# Altium PCB PA_Channel_SUP_CTRL.PcbDoc (part 2 of 2)
Units mm, origin at the board's own origin, x right, y up, seen from the top; angles counter-clockwise.
Board outline 189.6 x 31.35 mm, 2 copper layers (Top Layer, Bottom Layer), stack 1.571 mm thick; 72 components, 44 nets, 242 pads, 317 vias.
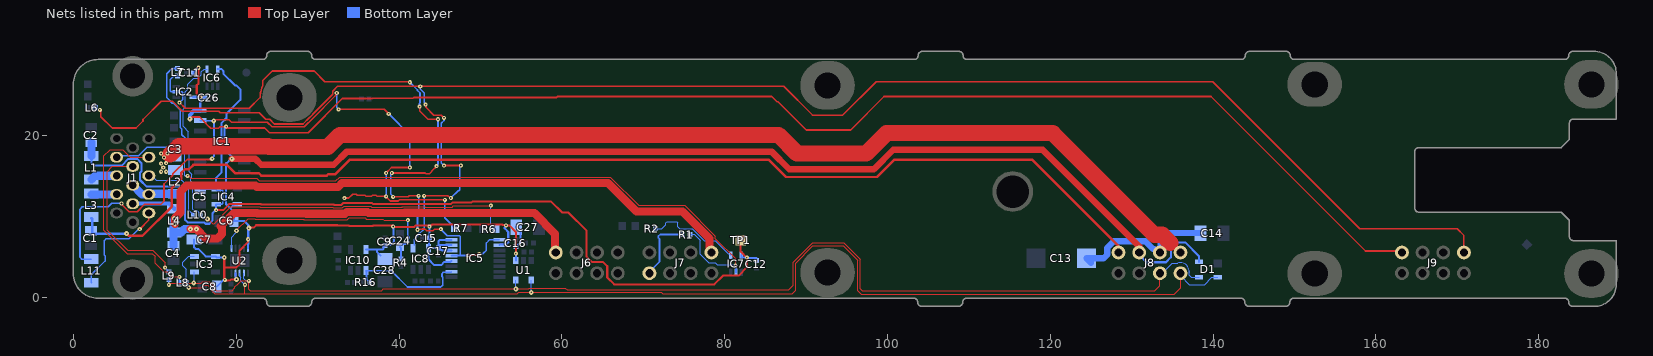
[diagram p2: the nets of this part, all layers, seen from the top]

## Via types
v1: diameter 0.5, hole 0.2, Top Layer to Bottom Layer, tented both sides, 251 vias
v2: diameter 0.6, hole 0.2, Top Layer to Bottom Layer, tented both sides, 55 vias
v3: diameter 0.6, hole 0.3, Top Layer to Bottom Layer, tented both sides, 11 vias

## Nets (pads, with @x,y where several pads share a name; then routed paths per layer and width w, separated by ;. In a path a pad name is that pad's centre, name@x,y a point inside that pad or via, vN(x,y) a via of type N, cw(c..) or ccw(c..) an arc to the next point about the centre after c; other vN are vias at no path point) (continued)
NetIC5_10: IC5.10 IC10.1 R16.2 | length 14.7
  Bottom Layer w0.203: R16.2@36.374,1.902 36.374,1.922 36.185,2.11 36.165,2.11 35.978,2.298 35.978,3.278 IC10.1@35.904,3.352 35.978,3.352 39.002,3.352 41.015,1.339 45.112,1.339 45.332,1.559 45.332,2.518 45.258,2.593 45.258,2.981 45.413,3.136 46.322,3.136 IC5.10@46.413,3.227
NetJ1_1: J1.1 L11.1 | length 13.4
  Top Layer w0.2: v1(8.113,8.445) 9.23,9.562 J1.1@9.23,10.432
  Bottom Layer w0.2: L11.1@2.193,1.864 L11.1@2.169,1.864 2.169,2.857 3.851,4.538 3.851,5.188 3.748,5.292 3.748,7.034 3.961,7.248 6.77,7.248 8.016,8.494 8.065,8.445 v1(8.113,8.445)
NetJ1_2: J1.2 J1.8 L2.1 | length 5.8
  Bottom Layer w1: J1.8@7.25,13.861 8.393,12.718 J1.2@9.23,12.718 9.312,12.8 L2.1@12.5,12.8
NetJ1_3: J1.3 L10.1 | length 9.1
  Bottom Layer w0.152: J1.3@9.23,15.004 9.555,15.004 10.12,14.439 13.259,14.439 14.133,13.565 14.133,10.763 14.689,10.207 L10.1@14.689,10.197
NetJ1_4: J1.4 L8.1 | length 28.2
  Top Layer w0.152: J1.4@9.23,17.29 6.929,17.29 5.999,18.219 4.5,18.219 3.72,17.439 3.72,8.291 6.572,5.439 9.671,5.439 9.993,5.117 9.993,4.254 10.729,3.517 10.764,3.517 11.039,3.242 11.411,3.242 12.075,2.577 v1(12.99,2.577)
  Bottom Layer w0.203: L8.1@12.962,1.891 12.962,2.549 v1(12.99,2.577)
NetJ1_7: J1.7 L4.1 | length 5.4
  Bottom Layer w0.5: J1.7@7.25,11.575 11.739,11.575 L4.1@12.364,10.95
NetJ1_9: J1.9 L9.1 | length 20.7
  Top Layer w0.152: J1.9@7.25,16.147 4.75,16.147 4.126,15.523 4.126,8.342 6.623,5.845 9.695,5.845 11.237,4.304 v1(11.237,3.72)
  Bottom Layer w0.152: v1(11.237,3.72) 11.694,3.263 L9.1@11.694,3.19
NetJ1_12: J1.12 L3.2 | length 3.1
  Bottom Layer w1: L3.2@2.164,12.7 5.252,12.7 J1.12@5.27,12.718
NetJ1_13: J1.13 L1.2 | length 3.3
  Bottom Layer w1: L1.2@2.164,14.55 2.618,15.004 J1.13@5.27,15.004
NetJ1_14: J1.14 L7.2 | length 20.7
  Bottom Layer w0.2: J1.14@5.27,17.29 5.436,17.456 7.956,17.456 9,18.5 11.493,18.5 11.67,18.323 12.927,18.323 13,18.25 13.257,18.25 13.477,18.47 13.477,18.477 13.75,18.75 13.75,19.59 13.291,20.049 13.291,20.765 13.112,20.944 13.112,23.064 12.263,23.913 12.12,23.913 11.418,24.615 11.418,27.549 12.053,28.183 L7.2@12.761,28.183
NetJ7_8: J7.8 R1.2 | length 8.3
  Bottom Layer w0.2: J7.8@70.5,2.98 71.975,4.455 71.975,7.255 71.833,7.398 71.833,7.563 72.054,7.784 R1.2@74.78,7.784
ON_OFF: IC2.2 IC5.1 IC5.13 L7.1 | length 82
  Top Layer w0.2: v1(13,24) 13.703,23.297 21.585,23.297 22.9,24.613 cw(c26.153,24.624) 23.25,26.092 23.25,26.734 24.393,27.877 29.56,27.877 30.86,26.577 41.225,26.577 v1(41.302,26.5) ; v1(39.092,15.353) 43.186,15.353 43.292,15.248 43.708,15.248 44.002,15.542 44.002,15.592 v1(44.602,16.192) ; v1(39.25,12.408) 41.106,12.408 41.245,12.547 v1(42.382,12.547) ; v1(42.248,8.378) 42.306,8.435 42.787,8.435 42.821,8.469 43.156,8.469 43.375,8.25 44.144,8.25 44.344,8.45 v1(45.112,8.45) ; v1@42.462,23.462 v1(42.5,23.5) 42.5,22.98 43.53,21.95 v1(44.756,21.95) ; v1(48.467,5.226) 49.614,5.226 49.75,5.362 v1(49.831,5.362)
  Bottom Layer w0.2: L7.1@12.761,27.263 12.276,27.263 11.847,26.834 11.847,25.463 11.989,25.321 IC2.2@12.592,25.321 13.262,25.321 13.38,25.203 13.38,24.38 v1(13,24) ; v1(39.092,15.353) 39.092,15.272 38.968,15.148 38.968,12.771 39.25,12.489 v1(39.25,12.408) ; v1(41.302,26.5) 42.248,25.554 42.248,25.493 42.55,25.191 42.55,23.959 42.484,23.894 42.484,23.516 v1(42.5,23.5) ; v1(42.248,8.378) 42.248,10.403 42.382,10.537 v1(42.382,12.547) ; v1(44.602,16.192) 44.602,16.273 44.756,16.428 v1(44.756,21.95) ; v1(45.112,8.45) 45.91,7.652 47.395,7.652 47.513,7.535 47.513,5.202 ; IC5.13@46.413,5.177 46.437,5.202 47.513,5.202 ; v1(48.467,5.226) 48.443,5.202 47.513,5.202 ; v1(49.831,5.362) 49.888,5.42 50.273,5.42 50.713,5.859 50.713,6.752 51.088,7.127 IC5.1@52.313,7.127
OUT_BIAS: C1.2 J8.7 L3.1 | length 142.2
  Top Layer w0.3: v2(6.5,7.9) 6.758,7.642 8.445,7.642 12.056,11.253 12.056,13.519 13.198,14.66 13.198,15.332 13.668,15.802 14.15,15.802 14.696,16.348 18.816,16.348 19.829,15.336 22.73,15.336 23.061,15.004 31.09,15.004 31.254,15.168 32.11,15.168 33.942,17 85.384,17 87.525,14.858 98.728,14.858 100.87,17 117.75,17 128.39,6.36 J8.7@128.39,5.27
  Bottom Layer w0.3: L3.1@2.164,9.8 2.25,9.714 2.25,7.9 v2(6.5,7.9)
Output_overdrive: IC1.13 L11.2 R7.2 | length 91.6
  Top Layer w0.203: v1(5.878,11.594) 5.878,11.519 6.797,10.6 7.805,10.6 8.707,11.503 10.714,11.503 11.096,11.885 11.096,13.988 12.179,15.071 12.179,15.239 13.94,17 v2@17.015,17 ; v2(17.206,21.754) 17.355,21.903 19.086,21.903 19.393,21.596 23.777,21.596 24.355,21.018 28.326,21.018 28.386,21.076 29.378,22.05 ccw(c26.853,24.624) 29.413,22.084 32.171,24.862 v1@32.301,25.129 ; v1(32.548,23.177) 38.155,23.177 v1(38.714,22.618) ; v1(33.25,12.25) 33.268,12.268 33.805,12.268 34.291,12.754 34.709,12.754 34.833,12.63 35.79,12.63 35.937,12.483 36.573,12.483 36.721,12.632 37.139,12.632 37.287,12.483 v1(38.39,12.483) 38.39,12.407 38.892,11.904 39.889,11.904 40.028,12.043 45.601,12.043 v1(45.61,12.053) ; v1(38.39,15.353) 38.39,15.364 39.052,16.025 v1(41.311,16.025)
  Bottom Layer w0.203: L11.2@2.169,4.764 0.999,4.764 0.772,4.99 0.772,10.899 1.061,11.188 4.246,11.188 4.686,11.627 5.845,11.627 v1(5.878,11.594) ; IC1.13@15.55,21.79 15.59,21.75 15.594,21.754 v2(17.206,21.754) 17.233,21.754 17.244,21.744 17.244,17.422 17.015,17.193 v2(17.015,17.105) ; v1(32.319,25.183) 32.319,23.405 v1(32.548,23.177) ; v1(38.39,12.483) v1(38.39,15.353) v1@38.39,15.493 ; v1(38.714,22.618) 41.311,20.021 v1(41.311,16.025) ; v1(45.61,12.053) 45.61,9.84 46.813,8.636 R7.2@46.813,8.586
P3V3: C6.2 C7.1 C8.2 C9.2 C11.2 C15.2 C16.2 C17.2 C26.2 C27.2 C28.2 D1.4 IC1.14 IC2.5 IC3.4 IC4.5 IC5.2 IC5.12 IC5.14 IC5.15 IC5.16 IC8.5 IC10.5 J8.5 J9.7 U1.1 U2.5 U2.9 | length 404.9
  Top Layer w0.203: v2(14.274,22) 14.5,22.226 15.488,22.226 16.297,21.417 16.297,21.377 16.834,20.84 17.791,20.84 17.994,21.043 v1@18.635,21.043 ; v1@18.73,20.885 23.483,20.885 24.06,20.307 28.813,20.307 33.007,24.501 36.704,24.501 36.721,24.519 41.686,24.519 41.796,24.628 59.322,24.628 59.444,24.75 85.786,24.75 86.423,24.112 86.554,24.112 90.029,20.637 95.465,20.637 99.578,24.75 139.75,24.75 158.73,5.77 J9.7@163.21,5.77
  Top Layer w0.254: v1(15.327,28.282) 15.327,26.338 15.119,26.13 15.119,25.131 15.555,24.695 v1(15.555,24.675) ; v1@18.5,2.297 18.5,3.75 ; v2(18.5,4.957) 18.5,3.75 ; v1@18.649,2.149 19.217,2.149 19.319,2.251 19.981,2.251 v2(20,2.27) ; v1(21.437,7.207) 21.437,6.876 20.383,5.822 20.383,4.165 19.969,3.75 18.5,3.75 ; v2(21.524,8.572) 21.59,8.638 22.139,8.638 22.425,8.923 32.395,8.923 32.42,8.898 33.77,8.898 33.847,8.821 36.748,8.821 36.824,8.898 37.853,8.898 37.859,8.892 v1@39.244,8.892 ; v1@39.417,8.718 41.84,8.718 42.029,8.907 v1@43.693,8.907 ; v1@43.904,8.892 44.041,9.029 52.676,9.029 52.752,8.953 53.066,8.953 v1(53.113,8.906) 53.522,8.906 54.331,8.097 v1(54.331,5.44)
  Top Layer w0.8: v2(19.433,17.078) 22.334,17.078 23.044,16.368 31.964,16.368 33.57,17.975 85.756,17.975 87.92,15.811 98.334,15.811 100.721,18.198 119.054,18.198 130.93,6.321 J8.5@130.93,5.27
  Bottom Layer w0.254: IC2.5@14.692,24.671 14.694,24.673 15.553,24.673 v1(15.555,24.675) ; C11.2@14.735,27.647 14.735,27.691 v1(15.327,28.282) ; C7.1@14.789,7.175 14.789,6.214 14.978,6.025 15.292,6.025 16.214,5.102 IC3.4@17.439,5.102 17.585,4.957 v2(18.5,4.957) ; IC1.14@15.55,23.06 15.55,24.624 15.575,24.65 16.104,24.65 C26.2@16.129,24.624 ; C8.2@17.586,1.383 v1@18.436,2.233 ; v1(18.73,21.043) 18.629,20.941 18.552,20.941 18.552,18.25 19.433,17.369 v2(19.433,17.078) 19.328,17.078 18.75,16.5 18.707,16.543 18.707,11.543 19.25,11 ; v2@19.898,2.466 U2.9@19.898,3.046 ; IC4.5@20.1,11.5 19.75,11.5 19.25,11 ; U2.5@21.398,6.096 21.398,7.168 v1(21.437,7.207) ; 21.443,6.617 21.443,8.951 20.944,9.45 C6.2@19.7,9.45 19.7,10.55 19.25,11 ; IC10.5@35.904,5.952 37.282,5.952 ; C28.2@37.705,5.202 37.282,5.625 37.282,5.952 ; v1(39.244,8.769) 39.317,8.695 39.317,7.255 39.38,7.192 39.38,6.982 38.89,6.492 38.29,6.492 C9.2@38.25,6.452 38.067,6.269 38.067,6.048 37.971,5.952 37.282,5.952 ; v1(43.708,8.752) 43.742,8.718 C15.2@43.742,7.346 43.666,7.27 43.666,6.178 IC8.5@43.645,6.156 ; IC5.12@46.413,4.527 46.315,4.429 45.551,4.429 45.145,4.023 44.315,4.023 43.59,4.747 IC8.5@43.59,6.102 IC8.5@43.645,6.156 ; IC5.14@46.413,5.827 45.307,5.827 45.16,5.973 45.001,5.973 C17.2@44.818,6.156 ; IC5.15@46.413,6.477 44.909,6.477 44.818,6.567 ; IC5.16@46.413,7.127 44.967,7.127 44.818,6.978 44.818,6.567 ; IC5.2@52.313,6.477 52.411,6.575 53.158,6.575 53.399,6.816 53.399,8.093 52.945,8.547 52.945,8.671 ; U1.1@54.331,4.59 v1(54.331,5.44) C16.2@54.331,6.29 54.641,6.601 54.757,6.601 54.92,6.764 54.92,8.149 C27.2@54.374,8.695 ; J8.5@131.039,5.27 131.039,5.161 131.819,4.381 134.224,4.381 134.816,4.973 134.816,6.441 135.2,6.825 136.578,6.825 138.281,5.122 D1.4@138.281,4.442 ; IC8.5@43.645,6.156 C17.2@44.818,6.156 ; C17.2@44.818,6.156 44.818,6.567
  Bottom Layer w0.5: v2(14.274,22) 14.274,22.48 14.854,23.06 IC1.14@15.55,23.06
  other v1: 18.574,2.223
P5V0_CH: C4.2 J6.7 J7.1 L4.2 | length 131.4
  Top Layer w1: v2(12.429,9.077) 12.429,9.815 13.109,10.495 13.109,13.083 13.838,13.812 22.334,13.812 22.499,13.647 32.509,13.647 32.979,14.118 35.274,14.118 ; v2(14.339,8.452) v2(15.065,8.452) 16.22,7.298 17.645,7.298 18.202,7.855 18.202,8.644 18.044,8.802 19.684,10.442 22.539,10.442 22.595,10.386 23.932,10.386 28.541,10.386 28.591,10.336 31.575,10.336 33.323,10.336 33.545,10.558 36.098,10.558 36.217,10.439 40.675,10.439 40.691,10.455 42.834,10.455 42.87,10.418 56.608,10.418 59.152,7.874 J6.7@59.152,5.602 ; 35.274,14.117 65.65,14.117 69.138,10.629 74.791,10.629 78.12,7.3 J7.1@78.12,5.52
  Bottom Layer w1: C4.2@12.25,6.4 v2@12.25,9.5 ; L4.2@12.364,8.05 13.236,8.05 13.236,8.07 13.618,8.452 v2(14.339,8.452) v2(15.065,8.452)
  other v2: 12.364,9.75
P5V0MP: C2.2 C5.2 C12.2 IC4.1 IC4.3 IC6.5 IC7.5 L1.1 TP1.1 | length 129.4
  Top Layer w0.254: v1(17.5,10.792) 18.357,10.792 19.091,11.526 22.988,11.526 23.044,11.471 31.974,11.471 32.024,11.42 32.874,11.42 33.096,11.642 36.667,11.642 36.786,11.523 40.047,11.523 40.063,11.539 43.283,11.539 43.298,11.523 46.339,11.523 46.554,11.738 48.882,11.738 49.013,11.87 58.638,11.87 60.014,10.494 60.755,10.494 63.021,8.228 63.021,5.052 63.682,4.391 65.064,4.391 65.561,3.894 65.561,2.512 66.402,1.671 78.723,1.671 79.782,2.73 81.697,2.73 82.713,3.746 v1(82.713,4.939) 81.951,5.701 TP1.1@81.951,7.098
  Bottom Layer w0.2: C5.2@15.55,13.35 IC4.3@17.45,13.35 ; IC4.1@17.5,11.5 18.2,11.5 18.327,11.627 18.327,13.25 17.55,13.25 IC4.3@17.45,13.35 ; IC4.3@17.5,13.4 IC4.3@17.45,13.35
  Bottom Layer w0.254: L1.1@2.164,17.45 2.164,16.586 2.5,16.25 5.889,16.25 6.715,17.076 7.785,17.076 8.329,16.532 8.329,15.568 8.151,15.389 8.151,14.486 8.958,13.679 13.516,13.679 13.679,13.516 13.679,9.618 14.015,9.283 16.006,9.283 16.179,9.11 16.659,9.11 17.046,9.497 17.046,10.307 17.062,10.324 17.062,10.438 v1@17.325,10.7 ; v1(17.5,10.792) IC4.1@17.5,11.5 ; IC4.3@17.5,13.4 17.5,14.75 18.146,15.396 18.146,21.475 18.775,22.104 18.775,22.625 20.479,24.329 20.479,25.616 19.97,26.125 19.821,26.125 18.391,27.554 18.391,27.888 18.166,28.113 IC6.5@17.691,28.113 ; IC7.5@82.042,5.253 82.042,4.95 82.052,4.939 v1(82.713,4.939) ; v1@82.713,4.89 C12.2@83.881,4.89
  Bottom Layer w1: L1.1@2.164,17.45 C2.2@2.164,19.1
P29V0_CH: C3.2 C13.1 C14.2 J8.1 J8.3 L2.2 | length 150.3
  Top Layer w2: 11.875,17.614 12.892,18.631 23.91,18.631 23.988,18.553 31.246,18.553 32.72,20.027 86.606,20.027 88.883,17.75 97.371,17.75 99.871,20.25 120.298,20.25 132.798,7.75 133.75,7.75 134.75,6.75
  Bottom Layer w0.762: C13.1@125.005,4.311 C13.1@124.446,4.87 126.56,4.87 127.007,5.316 127.007,6.147 127.817,6.957 131.673,6.957 132.616,6.014 132.776,6.014 133.037,5.753 133.453,5.753 J8.3@133.47,5.77 ; J8.3@133.47,5.574 133.574,5.678 133.574,7.516 134.021,7.962 C14.2@138.478,7.962
  other v1: 10.75,15.5 11.35,15.5 11,16 10.75,16.5 11.35,16.55 11.09,17.25 10.75,17.75 11.5,17.75
Refl_overdrive: IC1.10 L10.2 R6.2 | length 50.5
  Top Layer w0.152: v2@16.472,9.715 17.062,9.125 17.265,9.125 19.31,11.171 22.841,11.171 22.897,11.115 31.826,11.115 31.876,11.065 33.021,11.065 33.243,11.286 36.52,11.286 36.638,11.168 40.374,11.168 40.389,11.183 43.135,11.183 43.151,11.168 46.486,11.168 46.659,11.34 v1(51.25,11.34)
  Bottom Layer w0.152: IC1.10@15.55,17.98 14.23,17.98 14.184,17.934 14.184,15.492 14.479,15.198 14.479,14.802 14.408,14.731 14.408,14.339 14.596,14.15 14.596,10.88 14.73,10.746 15.1,10.746 16.368,9.478 16.419,9.529 v2(16.419,9.689) ; v1(51.25,11.34) 51.25,9.063 R6.2@51.863,8.45
RFA: IC7.4 R2.2 | length 11.7
  Bottom Layer w0.152: R2.2@71.499,8.5 72.265,8.5 72.771,9.006 72.771,9.204 72.905,9.338 74.095,9.338 74.229,9.204 74.229,8.771 74.5,8.5 76,8.5 77.508,6.992 78.847,6.992 80.403,5.436 80.618,5.436 80.742,5.313 IC7.4@80.742,5.253
RFB: IC6.4 IC7.2 R1.1 | length 97.6
  Top Layer w0.152: v1@14.118,15 14.118,14.976 14.221,14.873 14.245,14.873 14.411,14.707 22.469,14.707 22.801,14.376 32.207,14.376 32.677,14.846 65.951,14.846 69.44,11.358 75.093,11.358 78.849,7.602 78.849,7.294 81.341,4.801 v1(81.341,3.949)
  Bottom Layer w0.152: v1(14,15) 13.635,15 13.629,14.994 13.629,18.157 14.079,18.607 14.079,20.442 13.441,21.08 13.441,23.182 13.708,23.45 13.708,25.311 14.013,25.616 14.013,26.265 14.742,26.994 15.217,26.994 15.674,27.451 15.674,27.774 16.014,28.113 IC6.4@16.391,28.113 ; R1.1@75.72,7.817 76.252,7.817 77,7.069 77,5.344 78.035,4.309 78.807,4.309 79.057,4.059 81.231,4.059 v1(81.341,3.949) ; R1.1@75.885,7.717 R1.1@75.894,7.708
  Bottom Layer w0.254: v1(81.341,3.949) 81.392,3.898 IC7.2@81.392,3.153
RFL_PWR: IC8.4 J9.1 L6.2 | length 216.3
  Top Layer w0.2: v1(3.211,23.1) 3.335,22.977 3.335,22.265 4.729,20.871 7.657,20.871 8.52,21.734 8.52,21.921 10.755,24.155 12.134,24.155 13.345,22.945 17.805,22.945 18,22.75 22.781,22.75 23.581,21.95 24.077,21.95 24.655,21.372 28.18,21.372 28.928,22.12 ccw(c26.853,24.624) 29.357,22.549 31.817,25.009 31.817,25.391 32.423,25.998 v1(42.582,25.998) 87.253,25.998 90.786,22.464 94.488,22.464 98.601,26.577 139.964,26.577 158.041,8.5 170,8.5 170.83,7.67 J9.1@170.83,5.574 J9.1@170.83,5.286 ; v1(43.057,12.547) 43.065,12.555 45.973,12.555 46.261,12.268 v1(46.342,12.268) ; v1(43.25,23.75) 43.292,23.708 43.292,23.414 44.254,22.452 45.162,22.452 v1(45.5,22.114) ; v1(45.5,16.25) 45.523,16.273 v1(47.582,16.273)
  Bottom Layer w0.2: L6.2@2.655,23.38 2.934,23.1 v1(3.211,23.1) ; IC8.4@41.846,6.478 41.846,7.185 42.271,7.61 42.271,7.751 42.427,7.908 42.489,7.908 43.057,8.476 v1(43.057,12.547) ; v1(42.582,25.998) 42.601,25.979 42.601,25.639 43.057,25.182 43.057,24.017 43.25,23.824 v1(43.25,23.75) ; v1(45.5,16.25) 45.173,16.577 45.173,21.46 45.5,21.787 v1(45.5,22.114) ; v1@46.342,12.349 v1(46.342,12.268) 47.236,13.161 47.321,13.161 47.438,13.278 47.438,16.048 47.582,16.192 v1(47.582,16.273)
RFL_VREF: C24.1 R4.2 U2.1 | length 29.9
  Top Layer w0.152: v2(20,8.25) 20,8.293 21.42,9.714 22.237,9.714 22.293,9.658 28.239,9.658 28.289,9.608 33.625,9.608 33.846,9.829 35.797,9.829 35.936,9.69 37.995,9.69 38.133,9.552 39.764,9.552 v1(41.065,9.552)
  Bottom Layer w0.152: U2.1@19.398,6.096 19.398,7.476 20,8.078 v2(20,8.25)
  Bottom Layer w0.203: R4.2@40.21,4.792 40.21,6.132 C24.1@40.096,6.246 40.469,6.618 40.832,6.618 41.127,6.914 41.127,7.298 41.196,7.366 41.196,7.534 41.065,7.666 v1(41.065,9.552)
SCL: D1.3 IC3.1 J8.4 L9.2 U1.5 U2.7 | length 145.5
  Top Layer w0.152: v1(11.694,1.612) 11.895,1.813 14.742,1.813 15.669,1.813 15.842,1.986 16.658,1.986 17.236,1.408 17.236,1.164 17.493,0.906 19.459,0.906 19.8,1.247 19.8,1.339 20.202,1.741 20.219,1.741 20.529,2.051 20.529,2.068 20.552,2.091 21.242,2.091 21.523,1.81 21.523,1.047 21.664,0.906 37.843,0.906 38.03,1.094 54.325,1.094 54.331,1.099 54.336,1.094 55.886,1.094 56.007,1.215 60.411,1.215 60.616,1.01 87.877,1.01 88.407,1.54 88.407,4.409 90.794,6.796 94.603,6.796 96.635,4.765 96.635,1.149 96.915,0.868 132.868,0.868 133.47,1.47 J8.4@133.47,2.73
  Bottom Layer w0.152: v1(11.694,1.612) L9.2@11.694,2.27 ; v2@14.839,1.912 IC3.1@14.839,3.202 ; U2.7@20.898,3.046 20.898,2.363 21.17,2.091 21.523,2.091 v1(21.524,2.089) ; v2(54.331,1.094) U1.5@54.331,2.19 ; J8.4@133.47,2.73 134.982,4.242 135.636,4.242 cw(c136.01,3.23) 137.088,3.193 137.088,3.191 137.088,3.177 137.089,2.786 137.333,2.542 D1.3@138.281,2.542
  other v2: 14.742,1.841
SDA: D1.2 IC3.3 J8.2 L8.2 U1.4 U2.8 | length 148.5
  Top Layer w0.152: v2(14.133,1.282) 14.153,1.261 15.692,1.261 16.01,1.579 16.49,1.579 16.829,1.24 16.829,0.995 17.325,0.5 21.044,0.5 ; v1(21.044,1.612) 21.044,0.5 ; J8.2@136.01,2.73 136.01,1.26 135.212,0.462 96.747,0.462 96.33,0.879 96.33,4.639 94.579,6.39 90.819,6.39 88.712,4.283 88.712,0.936 88.275,0.5 72.404,0.5 72.218,0.686 54.671,0.686 54.485,0.5 21.044,0.5
  Bottom Layer w0.152: L8.2@13.882,1.891 14.085,1.688 14.085,1.33 v2(14.133,1.282) ; L8.2@13.906,1.915 13.803,2.018 13.803,3.531 13.401,3.933 13.401,4.371 14.132,5.102 IC3.3@14.839,5.102 ; U2.8@20.398,3.046 20.398,2.649 20.529,2.518 20.529,2.051 20.606,2.051 v1(21.044,1.612) ; v2(56.226,0.686) 56.226,2.185 U1.4@56.231,2.19 ; J8.2@136.01,2.73 137.103,1.637 138.961,1.637 139.865,2.542 D1.2@140.581,2.542
pads on no net: FTG1.FTG2 FTG2.1 IC1.1 IC1.2 IC1.3 IC1.4 IC1.5 IC1.6 IC2.1 IC3.5 IC4.4 IC5.6 IC5.7 IC6.1 IC7.1 J6.1 J6.2 J6.3 J6.4 J6.5 J7.3 J7.4 J7.5 J7.6 J8.6 J9.3 J9.5 U2.6

## Polygon pours and split planes (outlines as drawn)
GND on Bottom Layer "Bottom Layer-GND" (solid, remove dead copper, pour order 12): 0.25,3.5 0.5,2 1.5,0.75 3,0.25 24,0.25 24,-0.25 28.75,-0.25 28.75,0.25 104,0.25 104,-0.25 108.75,-0.25 108.75,0.25 188.5,0.25 189.25,1 189.25,6.75 183.75,6.75 183.5,7 183.5,9.5 182.5,10.25 165,10.25 164.5,10.5 164.5,18.5 164.75,18.75 182.5,18.75 183.5,19.5 183.5,21.75 183.75,22.25 189.25,22.25 189.25,28.25 188.75,28.75 188,29.5 187.5,30 184,30 184,29.25 183.75,29 149.5,29 149.25,29.25 144.25,29.25 144,29 29.25,29 29,29.25 24,29.25 23.75,29 2.75,29 1.25,28.25 0.25,26.5
GND on Top Layer "Top Layer-GND" (solid, remove dead copper, pour order 10): 0.25,3.5 0.5,2 1.5,0.75 3,0.25 24,0.25 24,-0.25 28.75,-0.25 28.75,0.25 104,0.25 104,-0.25 108.75,-0.25 108.75,0.25 188.5,0.25 189.25,1 189.25,6.75 183.75,6.75 183.5,7 183.5,9.5 182.5,10.25 165,10.25 164.5,10.5 164.5,18.5 164.75,18.75 182.5,18.75 183.5,19.5 183.5,21.75 183.75,22.25 189.25,22.25 189.25,28.25 188.75,28.75 188,29.5 187.5,30 184,30 184,29.25 183.75,29 149.5,29 149.25,29.25 144.25,29.25 144,29 29.25,29 29,29.25 24,29.25 23.75,29 2.75,29 1.25,28.25 0.25,26.5

## Keep-outs
Keep-Out Layer:
  lines w0.1: 0,2.75 0,5.5 0,6.5 0,23.5 0,26.25 cw(c3,26.25) 3,29.25 ; 0,3 ccw(c3,3) 3,0 5.5,0 ; 4.557,29.25 5.291,29.984 5.497,29.984 9.18,29.984 9.815,29.349 9.866,29.349 ; 9.866,29.25 23.25,29.25 ; 29.7,0 90.25,0 ; 29.7,29.25 90.5,29.25 ; 109.7,0 143.45,0 ; 109.75,29.25 143.5,29.25 ; 153.75,29.25 183.25,29.25 ; 153.934,0.012 183.25,0 ; 189.5,22 185.75,22 184.25,22 ccw(c184.25,21.5) 183.75,21.5 183.75,19.5 182.75,18.5 172.75,18.5 165.25,18.5 ccw(c165.25,18) 164.75,18 164.75,15.75 164.75,11 ccw(c165.25,11) 165.25,10.5 181.25,10.5 182.75,10.5 183.75,9.5 183.75,7.5 ccw(c184.25,7.5) 184.25,7 185.75,7 189.5,7 ; 189.5,7 189.5,7

## Other copper
Top Layer:
  rectangle net GND: 148.016,22.643 157.363,28.892
  rectangle net GND: 149.413,4.736 150.404,5.701
  rectangle net GND: 149.959,4.254 155.916,6.559
  rectangle net GND: 148.469,0.291 157.541,5.068
  rectangle net GND: 181.874,0.367 189.19,6.689
  rectangle net GND: 185.413,22.592 187.386,22.903
  rectangle net GND: 183.823,28.18 186.142,29.177
  rectangle net GND: 188.351,22.31 189.19,25.412
  rectangle net GND: 182.865,22.796 188.58,28.739
  rectangle net GND: 3.77,24.472 10.577,28.917
  rectangle net GND: 22.845,1.307 31.75,4.5
  rectangle net GND: 22.75,4.5 31.25,8.5
  rectangle net GND: 144.25,29 149.25,30.25
  rectangle net GND: 24,-1 28.75,0
  rectangle net GND: 103.952,-1 108.7,-0.095
  rectangle net GND: 144.25,-1 149.25,0.5
  rectangle net GND: 104,28.5 109,30.25
  rectangle net GND: 24,29 29,30.25
  rectangle net P29V0_CH: 10.5,15.25 11.925,18.25
  rectangle net P29V0_CH: 132.649,4.85 136.815,6.921
  region net GND: 189.513,27.608 ccw(c186.873,27.608) 186.873,30.248 184.263,30.248 ccw(c184.263,29.748) 183.763,29.748 183.763,27.498
  region net GND: 189.5,1.64 cw(c186.86,1.64) 186.86,-1 184.25,-1 cw(c184.25,-0.5) 183.75,-0.5 183.75,1.75
Bottom Layer:
  rectangle net RFL_PWR: 2.736,23.1 3.211,23.297
  rectangle net GND: 148.245,1.612 157.033,4.812
  rectangle net GND: 147.762,24.751 157.973,28.053
  rectangle net GND: 29.424,3.136 30.465,7.784
  rectangle net GND: 29.373,23.354 30.846,26.377
  rectangle net GND: 91.409,3.123 93.813,7.556
  rectangle net GND: 88.039,1.75 97.115,4.355
  rectangle net GND: 91.679,21.957 94.092,25.767
  rectangle net GND: 85.786,24.75 97.14,27.774
  region net GND: 29.867,0.469 29.867,8.469 22.867,8.469 22.867,0.469
  region net GND: 29.867,20.484 29.867,28.484 22.867,28.484 22.867,20.484
  rectangle net GND: 104.033,-1 108.75,-0.29
  rectangle net GND: 144.25,-1 149.25,1.5
  rectangle net GND: 24,-1 28.75,1.25
  rectangle net GND: 24,28.087 29,30.25
  rectangle net GND: 104,28.5 109,30.25
  rectangle net GND: 144.25,28.25 149.25,30.25
  rectangle net P29V0_CH: 10.5,15.25 12.75,18
  rectangle net GND: 87.793,0.317 97.14,7.784
  rectangle net GND: 86.066,20.687 98.207,28.942
  rectangle net GND: 145.857,21.195 157.821,28.942
  rectangle net GND: 147.508,0.317 157.871,7.962
  rectangle net GND: 181.9,2.222 189.24,6.489
  rectangle net GND: 182.078,0.25 187.716,2.907
  rectangle net GND: 181.747,22.311 189.19,27.571
  rectangle net GND: 184.186,26.479 187.589,29
  rectangle net GND: 182.56,27.139 184.694,28.892
  region net GND: 189.527,27.606 ccw(c186.887,27.606) 186.887,30.246 184.277,30.246 ccw(c184.277,29.746) 183.777,29.746 183.777,27.496
  region net GND: 189.5,1.64 cw(c186.86,1.64) 186.86,-1 184.25,-1 cw(c184.25,-0.5) 183.75,-0.5 183.75,1.75

## Silkscreen, mask and mechanical layers (free items; w line width, h text height)
Top Overlay:
  lines w0.1: 154.366,9.334 159.853,9.334 160.894,8.292 160.894,1.612 161.631,0.875 171.74,0.875 ; 154.392,16.192 161.072,16.192 162.469,14.795 162.469,8.064 163.688,6.844 172.248,6.844
  lines w0.254: 62.5,4.242 62.838,4.242 62.901,4.304 62.901,7.53 ; 65.193,4.057 65.542,4.406 65.542,7.86 ; 67.764,3.884 68.286,4.406 68.286,8.673
  text "10" at 6.157,20.078 h1.2
  text "5" at 10.526,18.96 h1.2
  text "PA_Channel SUP CTRL v1.6.1" at 70.331,18.911 h2
  text "15" at 1.687,18.884 h1.2
  text "FR_RST" at 158.608,16.827 h0.76 r90
  text "RFL_PWR" at 160.488,16.776 h0.76 r90
  text "OUT_OVD" at 156.551,16.725 h0.76 r90
  text "3V3" at 154.62,16.649 h0.76 r90
  text "FR_VREF" at 160.462,9.791 h0.76 r90
  text "FR_PWR" at 156.525,9.74 h0.76 r90
  text "GND" at 155.128,9.715 h0.76 r90
  text "1" at 10.348,9.562 h1.2
  text "SIG_GND" at 158.583,9.562 h0.76 r90
  text "11" at 2.042,9.486 h1.2
  text "FR_RST" at 68.946,9.08 h0.76 r90
  text "IN_VREF" at 66,8.763 h0.76 r90
  text "P5V0MP" at 82.383,8.724 h0.76 r90
  text "P5V0" at 78.649,7.632 h0.76 r90
  text "INPWR" at 63.5,7.53 h0.76 r90
  text "P5V0" at 59.421,7.352 h0.76 r90
  text "P3V3" at 131.278,7.2 h0.76 r90
  text "IN_OVD" at 61.75,7.124 h0.76 r90
  text "RFA" at 69.657,7.124 h0.76
  text "OUT / BIAS" at 129.296,6.946 h0.76 r90
  text "P29V0" at 136.383,6.794 h0.76 r90
  text "6" at 6.589,6.768 h1.2
  text "P29V0" at 133.767,6.768 h0.76 r90
  text "GND" at 58.024,0.647 h0.76
  text "GND" at 77.455,0.621 h0.76
  text "RFB" at 69.53,0.571 h0.76
  text "SCL" at 133.081,0.418 h0.76
  text "SDA" at 135.951,0.418 h0.76
  text "Alert" at 128.941,0.393 h0.76
  text "GND" at 126.147,0.342 h0.76
Bottom Overlay:
  text "PA_Channel SUP CTRL v1.6.1" at 84.669,12.661 h2
Top Solder:
  rectangle: 23.25,-1.25 29.75,0
  rectangle: 103.5,-1.25 109.5,0
  rectangle: 143.75,-1.5 149.75,0
  rectangle: 143.5,29.25 149.5,30.25
  rectangle: 103.3,29.25 109.5,30.25
  rectangle: 23.25,29.25 29.25,30.25
  region: 188.958,29.193 ccw(c186.847,27.608) 186.847,30.248 184.237,30.248 ccw(c184.237,29.748) 183.737,29.748 183.697,29.193
  region: 188.972,0.055 cw(c186.86,1.64) 186.86,-1 184.25,-1 cw(c184.25,-0.5) 183.75,-0.5 183.71,0.055
Bottom Solder:
  rectangle: 22.25,0 31.25,29.25
  region: 97.538,7.734 88.038,7.734 88.038,-0.016 97.538,-0.016
  rectangle: 87.75,21.5 97.25,29.25
  rectangle: 23.25,-1.25 29.75,0
  rectangle: 103.5,-1.25 109.5,0
  rectangle: 143.75,-1.5 149.75,0
  rectangle: 143.5,29.25 149.5,30.25
  rectangle: 103.3,29.25 109.5,30.25
  rectangle: 23.25,29.25 29.25,30.25
  region: 188.958,29.193 ccw(c186.847,27.608) 186.847,30.248 184.237,30.248 ccw(c184.237,29.748) 183.737,29.748 183.697,29.193
  region: 188.909,-0.025 cw(c186.86,1.64) 186.86,-1 184.25,-1 cw(c184.25,-0.5) 183.75,-0.5 183.75,-0.048
Mechanical 1:
  drawing of 268 lines, arcs and shapes, not listed
  text "Layer" at 15.969,56.038 h1.52
  text "Name" at 26.38,56.038 h1.52
  text "Material" at 49.996,56.038 h1.52
  text "Thickness" at 71.834,56.038 h1.52
  text "Constant" at 88.34,56.038 h1.52
  text "Board Layer Stack" at 102.814,56.038 h1.52
  text "Top Overlay" at 26.38,52.99 h1.52
  text "Top Solder" at 26.38,49.942 h1.52
  text "Solder Resist" at 49.996,49.942 h1.52
  text "0.010mm" at 71.834,49.942 h1.52
  text "4.8" at 88.34,49.942 h1.52
  text "1" at 15.969,46.894 h1.52
  text "Top Layer" at 26.38,46.894 h1.52
  text "0.036mm" at 71.834,46.894 h1.52
  text "Dielectric 1" at 26.38,43.846 h1.52
  text "FR-4" at 49.996,43.846 h1.52
  text "1.500mm" at 71.834,43.846 h1.52
  text "4.8" at 88.34,43.846 h1.52
  text "2" at 15.969,40.798 h1.52
  text "Bottom Layer" at 26.38,40.798 h1.52
  text "0.036mm" at 71.834,40.798 h1.52
  text "Bottom Solder" at 26.38,37.75 h1.52
  text "Solder Resist" at 49.996,37.75 h1.52
  text "0.010mm" at 71.834,37.75 h1.52
  text "4.8" at 88.34,37.75 h1.52
  text "Bottom Overlay" at 26.38,34.702 h1.52
Mechanical 2:
  circle w0.013: c73.563,32.123 r1.007
  circle w0.013: c190.263,32.123 r1.007
  circle w0.013: c152.513,2.998 r1.007
  circle w0.013: c26.513,24.623 r1.007
  circle w0.013: c151.363,-2.877 r1.007
  circle w0.013: c112.463,32.123 r1.007
  circle w0.013: c33.013,26.248 r1.007
  circle w0.013: c146.713,2.998 r1.007
  circle w0.013: c33.013,2.998 r1.007
  circle w0.013: c106.513,26.248 r1.007
  circle w0.013: c-4.237,-2.877 r1.007
  circle w0.013: c7.264,27.248 r3
  circle w0.013: c-4.237,32.123 r1.007
  circle w0.013: c151.363,32.123 r1.007
  circle w0.013: c106.513,2.998 r1.007
  circle w0.013: c7.264,2.248 r3
  circle w0.013: c112.513,2.998 r1.007
  circle w0.013: c112.513,26.248 r1.007
  circle w0.013: c152.513,26.248 r1.007
  circle w0.013: c-4.737,14.623 r1.007
  circle w0.013: c146.713,26.248 r1.007
  circle w0.013: c26.513,4.623 r1.007
  circle w0.013: c186.513,26.248 r1.007
  circle w0.013: c34.663,32.123 r1.007
  circle w0.013: c129.063,11.898 r1.007
  circle w0.013: c186.513,2.998 r1.007
  circle w0.013: c190.263,-2.877 r1.007
  circle w0.013: c73.563,-2.877 r1.007
  circle w0.013: c129.163,23.698 r1.007
  circle w0.013: c112.463,-2.877 r1.007
  circle w0.013: c34.663,-2.877 r1.007
  lines w0.01: 152.5,25.132 152.5,26.25 153.872,26.25
  lines w0.013: 32.101,3.423 33.926,3.423 ; 105.601,3.423 107.426,3.423 ; 111.601,3.423 113.426,3.423 ; 128.06,11.823 130.067,11.823 ; 128.305,24.223 130.022,24.223 ; 145.801,3.423 147.626,3.423 ; 151.601,3.423 153.426,3.423 ; 185.601,3.423 187.426,3.423 ; 189.763,2.623 cw(c186.763,2.623) 186.763,-0.377 181.763,-0.377 ; 189.763,26.623 ccw(c186.763,26.623) 186.763,29.623 181.763,29.623 ; -7.237,-5.377 192.763,-5.377 192.763,34.623 -7.237,34.623 ; -7.237,-5.377 -11.237,-5.377 -11.237,34.623 -7.237,34.623 ; -7.237,-5.377 -7.237,34.623 ; 21.538,-0.093 cw(c20.263,2.623) 20.263,-0.377 14.763,-0.377 cw(c12.527,1.623) 12.527,-1.377 0.763,-1.377 cw(c0.763,1.623) -2.237,1.623 -2.237,27.623 cw(c0.763,27.623) 0.763,30.623 12.527,30.623 cw(c12.527,27.623) 14.763,29.623 20.263,29.623 cw(c20.263,26.623) 21.538,29.339 ; 21.538,-0.093 ccw(c20.263,2.623) 23.263,2.623 23.263,26.623 ccw(c20.263,26.623) 21.538,29.339 ; 21.538,-0.093 ccw(c23.999,1.623) 23.999,-1.377 29.027,-1.377 ccw(c29.027,1.623) 31.488,-0.093 ; 21.538,29.339 cw(c23.999,27.623) 23.999,30.623 29.027,30.623 cw(c29.027,27.623) 31.488,29.339 ; 29.763,15.436 ccw(c31.513,17.873) 31.513,14.873 38.013,14.873 ccw(c38.013,17.873) 41.013,17.873 41.013,18.123 ccw(c38.013,18.123) 38.013,21.123 31.513,21.123 ccw(c31.513,18.123) 29.763,20.56 ; 29.763,15.436 cw(c31.513,17.873) 28.513,17.873 28.513,18.123 cw(c31.513,18.123) 29.763,20.56 ; 29.763,15.436 29.763,2.623 ccw(c32.763,2.623) 31.488,-0.093 ; 29.763,20.56 29.763,26.623 cw(c32.763,26.623) 31.488,29.339 ; 31.488,-0.093 ccw(c32.763,2.623) 32.763,-0.377 101.763,-0.377 ; 31.488,29.339 cw(c32.763,26.623) 32.763,29.623 101.763,29.623 ; 101.763,-0.377 ccw(c103.999,1.623) 103.999,-1.377 109.527,-1.377 ccw(c109.527,1.623) 111.763,-0.377 ; 101.763,-0.377 111.763,-0.377 ; 101.763,29.623 cw(c103.999,27.623) 103.999,30.623 109.527,30.623 cw(c109.527,27.623) 111.763,29.623 ; 101.763,29.623 111.763,29.623 ; 111.763,-0.377 140.263,-0.377 ; 111.763,29.623 140.263,29.623 ; 140.263,-0.377 ccw(c142.499,1.623) 142.499,-1.377 148.027,-1.377 ccw(c148.027,1.623) 150.263,-0.377 ; 140.263,-0.377 150.263,-0.377 ; 140.263,29.623 cw(c142.499,27.623) 142.499,30.623 148.027,30.623 cw(c148.027,27.623) 150.263,29.623 ; 140.263,29.623 150.263,29.623 ; 150.263,-0.377 181.763,-0.377 ; 150.263,29.623 181.763,29.623 ; 181.763,-0.377 ccw(c183.999,1.623) 183.999,-1.377 186.763,-1.377 ccw(c186.763,1.623) 189.763,1.623 189.763,10.387 ; 181.763,29.623 cw(c183.999,27.623) 183.999,30.623 186.763,30.623 cw(c186.763,27.623) 189.763,27.623 189.763,19.859 ; 189.763,10.387 ccw(c187.763,12.623) 190.763,12.623 190.763,17.623 ccw(c187.763,17.623) 189.763,19.859 ; 189.763,10.387 cw(c187.763,12.623) 187.763,9.623 177.263,9.623 cw(c177.263,12.623) 174.263,12.623 174.263,17.623 cw(c177.263,17.623) 177.263,20.623 187.763,20.623 cw(c187.763,17.623) 189.763,19.859 ; 2.164,9.079 ccw(c5.164,9.079) 4.643,6.124 8.843,5.384 ccw(c9.364,8.338) 12.364,8.338 12.364,21.158 ccw(c9.364,21.158) 8.843,24.113 4.643,23.372 ccw(c5.164,20.418) 2.164,20.418 2.164,9.079
Mechanical 3:
  drawing of 155 lines, arcs and shapes, not listed

## Text inside footprints (layer, text, board x,y; h text height)
J6: Bottom Overlay "1" at 68.816,5.32 h1.2
J7: Bottom Overlay "1" at 80.316,5.32 h1.2
J8: Bottom Overlay "1" at 137.966,5.32 h1.2
J9: Bottom Overlay "1" at 172.786,5.32 h1.2